# Altium PCB PCB1.PcbDoc (part 2 of 2)
Units mil, origin at the board's own origin, x right, y up, seen from the top; angles counter-clockwise.
Board outline 13600 x 4300 mil, 2 copper layers (Top Layer, Bottom Layer); 273 components, 193 nets, 742 pads, 0 vias.
Unrouted connection lines stored in the file: 1.
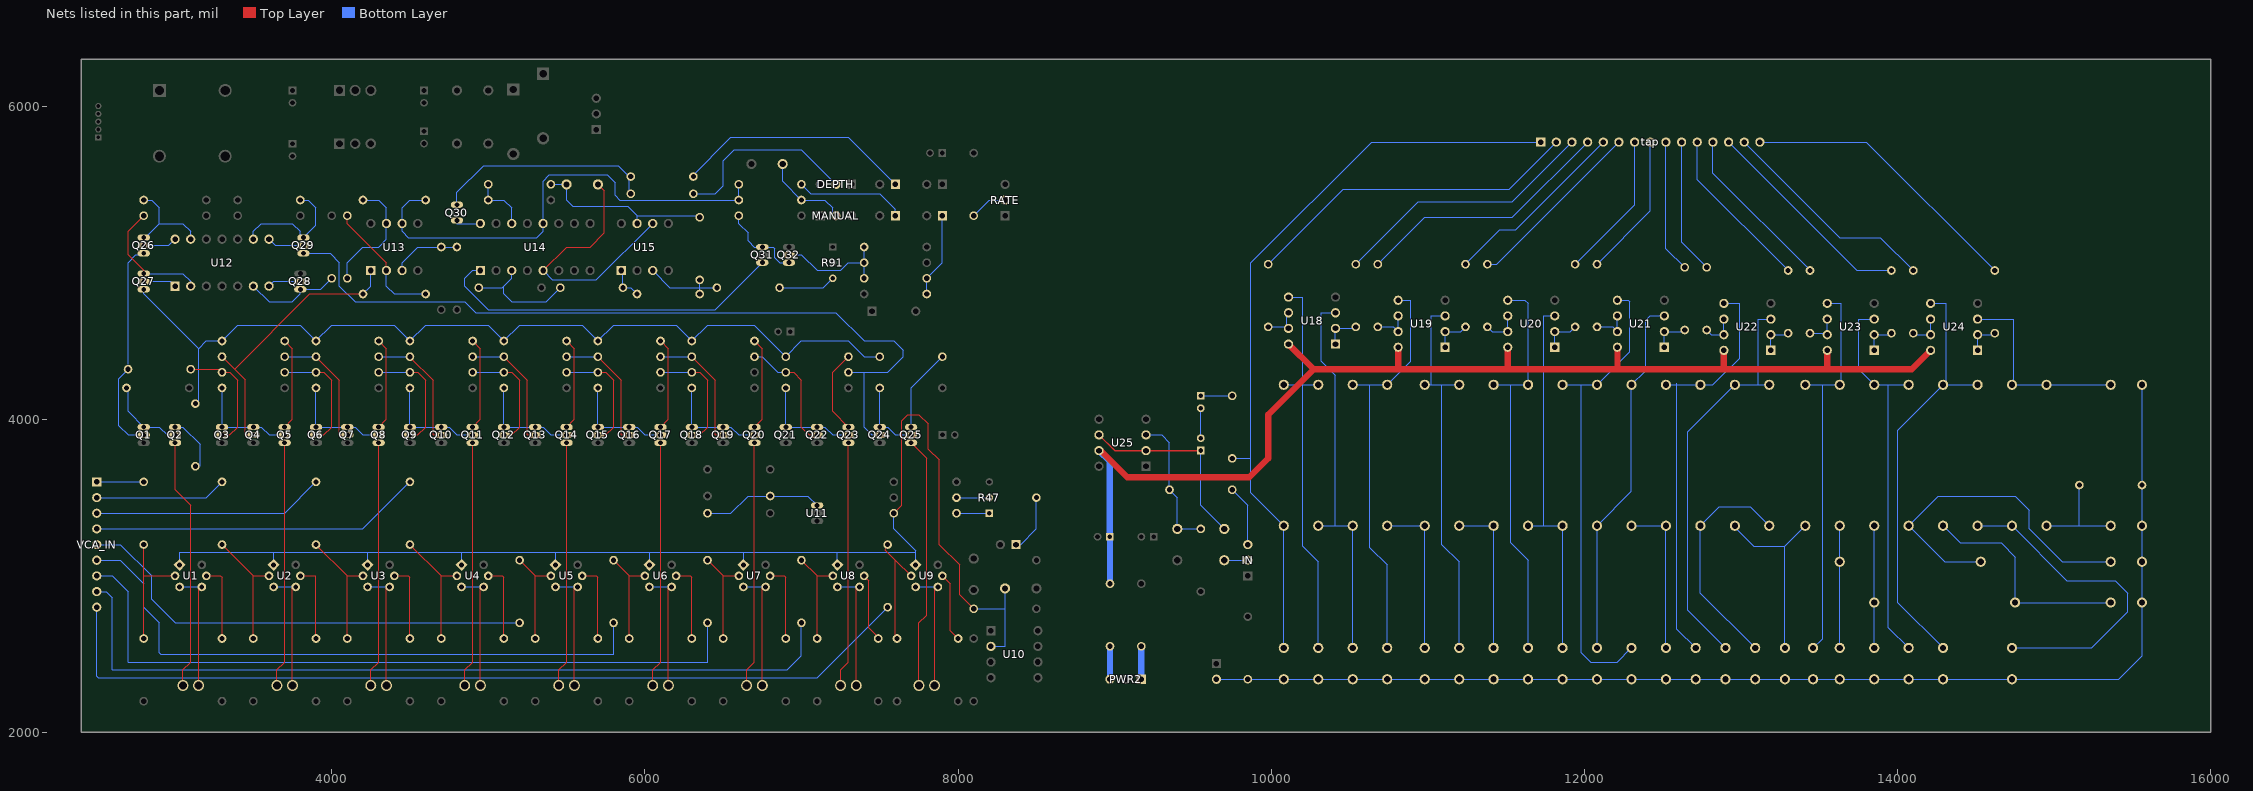
[diagram p2: the nets of this part, all layers, seen from the top]

## Nets (pads, with @x,y where several pads share a name; then routed paths per layer and width w, separated by ;. In a path a pad name is that pad's centre, name@x,y a point inside that pad or via, vN(x,y) a via of type N, cw(c..) or ccw(c..) an arc to the next point about the centre after c; other vN are vias at no path point) (continued)
NetC8_2: C8.2 R46.1 R49.2 U1.1 U2.1 U3.1 U4.1 U5.1 U6.1 U7.1 U8.1 U9.1 U10.2 | length 8498.2
  Top Layer w7.87: R46.1@7590,3400 7640,3450 7640,3990 7680,4030 7750,4030 7810,3970 7810,3810 7880,3740 7880,3200 8010,3070 8010,2880 R49.2@8100,2790
  Bottom Layer w7.87: U1.1@3029.29,3070.71 3029.29,3149.29 3030,3150 3630,3150 ; U2.1@3630,3071.42 3630,3150 ; U3.1@4230,3071.42 4230,3150 ; U4.1@4830,3071.42 4830,3150 ; U5.1@5430,3071.42 5430,3150 ; U6.1@6030,3071.42 6030,3150 ; U7.1@6630,3071.42 6630,3150 ; U8.1@7230,3071.42 7230,3150 ; R46.1@7590,3400 7590,3300 7729.29,3160.71 7729.29,3150 ; U9.1@7729.29,3070.71 7729.29,3150 ; R49.2@8100,2790 8300,2790 ; U10.2@8210,2550 8300,2550 C8.2@8300,2920 ; 3630,3150 4230,3150 ; 4230,3150 4830,3150 ; 4830,3150 5430,3150 ; 5430,3150 6030,3150 ; 6030,3150 6630,3150 ; 6630,3150 7230,3150 ; 7230,3150 7729.29,3150
NetC10_1: C10.1 R83.2 R89.2 U15.7 | length 1141.4
  Bottom Layer w7.87: R83.2@5400,5500 C10.1@5500,5500 5500,5400 5540,5360 5890,5360 5950,5300 ; U15.7@5950,5250 5950,5300 ; R89.2@6350,5300 5950,5300
NetC10_2: C10.2 U14.5 U15.6 | length 1689.9
  Top Layer w7.87: U14.5@5350,4950 5500,5100 5650,5100 5740,5190 5740,5460 C10.2@5700,5500
  Bottom Layer w7.87: U14.5@5350,4950 5410,4890 5690,4890 U15.6@6050,5250
NetC11_1: C11.1 MANUAL.2 R80.1 | length 550.4
  Bottom Layer w7.87: C11.1@6880,5630 6880,5520 R80.1@7000,5400 7150,5400 7200,5350 MANUAL.2@7200,5300
NetC14_1: C14.1 C17.1 U25.2 U25.6 | length 1254.4
  Top Layer w7.87: C14.1@9549.37,3800 C14.1@9550,3800.63
  Top Layer w10: U25.6@8900,3900 9000,3800 U25.2@9200,3800 C14.1@9549.37,3800
  Bottom Layer w7.87: C14.1@9550,3800.63 9550,3450 C17.1@9700,3300
NetC14_2: C14.2 C15.2 | length 191.3
  Bottom Layer w7.87: C14.2@9550,3879.37 C15.2@9550,4070.63
NetC15_1: C15.1 R113.1 | length 199.4
  Bottom Layer w7.87: C15.1@9550,4149.37 R113.1@9749.37,4149.37
NetC16_2: C16.2 R112.1 R114.2 U25.3 | length 891.4
  Bottom Layer w7.87: U25.3@9200,3900 9300,3900 9350,3850 R112.1@9350,3550 9400,3500 C16.2@9400,3300 R114.2@9550,3300
NetC17_2: C17.2 IN.2 | length 150
  Bottom Layer w7.87: C17.2@9700,3100 IN.2@9850,3100
NetC18_1: C18.1 C19.1 C20.1 C21.1 C22.1 C23.1 C24.1 C25.1 C26.1 C27.1 C28.1 C29.1 C30.1 C31.1 C32.1 C33.1 C34.1 C35.1 C36.1 C37.1 C38.1 C39.1 C40.1 C41.1 C42.1 C43.1 CH.2 R115.2 R116.1 | length 7692.1
  Bottom Layer w7.87: CH.2@9660,2340 9860,2340 C18.1@10080,2340 C19.1@10300,2340 C20.1@10520,2340 C21.1@10740,2340 C22.1@10980,2340 C23.1@11200,2340 C24.1@11420,2340 C25.1@11640,2340 C26.1@11860,2340 C28.1@12080,2340 C27.1@12300,2340 C29.1@12520,2340 C30.1@12710,2340 C32.1@12900,2340 C31.1@13090,2340 C33.1@13280,2340 C34.1@13460,2340 C35.1@13630,2340 C38.1@13850,2340 C37.1@14070,2340 C40.1@14290,2340 C41.1@14730,2340 15410,2340 15560,2490 C39.1@15560,2830 C36.1@15560,3090 C43.1@15560,3320 R116.1@15560,3580 C42.1@15560,4220
NetC18_2: C18.2 L1.1 R113.2 tap.1 | length 4835.9
  Bottom Layer w7.87: R113.2@9750,3750 9870,3750 ; C18.2@10080,2540 L1.1@10080,3320 9870,3530 9870,3750 ; tap.1@11720,5770 10640,5770 9870,5000 9870,3750
NetC19_2: C19.2 L1.2 L2.1 U18.5 | length 2591.4
  Bottom Layer w7.87: L1.2@10080,4220 10200,4220 ; U18.5@10110,4780 10200,4780 10200,4220 ; C19.2@10300,2540 10300,3090 10200,3190 10200,4220 ; L2.1@10300,4220 10200,4220
NetC20_2: C20.2 L2.2 L3.1 U18.3 | length 2487.3
  Bottom Layer w7.87: L2.2@10300,3320 10410,3320 ; U18.3@10410,4680 10320,4680 10320,4370 10410,4280 10410,3320 ; C20.2@10520,2540 L3.1@10520,3320 10410,3320
NetC21_2: C21.2 L3.2 L4.1 U19.5 | length 2627.7
  Bottom Layer w7.87: L3.2@10520,4220 10630,4220 ; C21.2@10740,2540 10740,3070 10630,3180 10630,4220 ; U19.5@10810,4760 10890,4760 10890,4370 L4.1@10740,4220 10630,4220
NetC22_2: C22.2 L4.2 L5.1 | length 1020
  Bottom Layer w7.87: L4.2@10740,3320 L5.1@10980,3320 C22.2@10980,2540
NetC23_2: C23.2 L5.2 L6.1 U19.3 | length 2475.6
  Bottom Layer w7.87: L5.2@10980,4220 11020,4220 ; U19.3@11110,4660 11020,4660 11020,4220 ; C23.2@11200,2540 11200,3090 11090,3200 11090,4220 ; L6.1@11200,4220 11090,4220 ; 11020,4220 11090,4220
NetC24_2: C24.2 L6.2 L7.1 | length 1000
  Bottom Layer w7.87: L6.2@11200,3320 L7.1@11420,3320 C24.2@11420,2540
NetC25_2: C25.2 L7.2 L8.1 U20.5 | length 2603.8
  Bottom Layer w7.87: L7.2@11420,4220 11530,4220 ; U20.5@11510,4760 11620,4760 11640,4740 L8.1@11640,4220 11530,4220 ; C25.2@11640,2540 11640,3100 11530,3210 11530,4220
NetC26_2: C26.2 L8.2 L9.1 U20.3 | length 2410
  Bottom Layer w7.87: L8.2@11640,3320 11740,3320 ; U20.3@11810,4660 11740,4660 11740,3320 ; C26.2@11860,2540 L9.1@11860,3320 11740,3320
NetC27_2: C27.2 L9.2 L10.1 U21.5 | length 3013.3
  Bottom Layer w7.87: L9.2@11860,4220 11980,4220 ; U21.5@12210,4760 12280,4760 12290,4750 12290,4430 L10.1@12080,4220 11980,4220 ; C27.2@12300,2540 12210,2450 12040,2450 11980,2510 11980,4220
NetC28_2: C28.2 L10.2 L11.1 U21.3 | length 2350.8
  Bottom Layer w7.87: C28.2@12080,2540 L10.2@12080,3320 12300,3540 L11.1@12300,4220 12390,4310 12390,4630 12420,4660 U21.3@12510,4660
NetC29_2: C29.2 L11.2 L12.1 | length 1000
  Bottom Layer w7.87: L11.2@12300,3320 L12.1@12520,3320 C29.2@12520,2540
NetC30_2: C30.2 L12.2 L13.1 U22.5 | length 2730.1
  Bottom Layer w7.87: L12.2@12520,4220 12590,4220 ; 12590,4230 12590,4220 ; C30.2@12710,2540 12590,2660 12590,4220 ; U22.5@12890,4740 12990,4740 12990,4390 12820,4220 L13.1@12740,4220 12590,4220
NetC31_2: C31.2 L13.2 L14.1 | length 1464.4
  Bottom Layer w7.87: C31.2@13090,2540 12740,2890 L13.2@12740,3320 12860,3440 13060,3440 L14.1@13180,3320
NetC32_2: C32.2 L14.2 L15.1 U22.3 | length 2623.7
  Bottom Layer w7.87: C32.2@12900,2540 12660,2780 12660,3920 L15.1@12960,4220 13110,4220 ; L14.2@13180,4220 13110,4220 ; U22.3@13190,4640 13110,4640 13110,4220
NetC33_2: C33.2 L15.2 L16.1 | length 1213.6
  Bottom Layer w7.87: L15.2@12960,3320 12960,3310 13080,3190 13280,3190 ; C33.2@13280,2540 13280,3190 ; L16.1@13410,3320 13280,3190
NetC34_2: C34.2 L16.2 L17.1 U23.5 | length 2539
  Bottom Layer w7.87: L16.2@13410,4220 13520,4220 ; C34.2@13460,2540 13520,2600 13520,4220 ; U23.5@13550,4740 13640,4740 13640,4230 L17.1@13630,4220 13520,4220
NetC35_2: C35.2 L17.2 L18.1 | length 780
  Bottom Layer w7.87: C35.2@13630,2540 L18.1@13630,3090 L17.2@13630,3320
NetC36_2: C36.2 L18.2 L19.1 | length 2168.2
  Bottom Layer w7.87: L18.2@14530,3090 14300,3090 L19.1@14070,3320 14260,3510 14750,3510 14840,3420 14840,3300 15050,3090 C36.2@15360,3090
NetC37_2: C37.2 L19.2 L20.1 U23.3 | length 2515.3
  Bottom Layer w7.87: U23.3@13850,4640 13750,4640 13750,4320 L20.1@13850,4220 L19.2@14070,4220 ; 13940,4220 13940,2670 C37.2@14070,2540
NetC38_2: C38.2 L20.2 L21.1 | length 780
  Bottom Layer w7.87: C38.2@13850,2540 L21.1@13850,2830 L20.2@13850,3320
NetC39_2: C39.2 L21.2 L22.1 | length 1442.8
  Bottom Layer w7.87: L22.1@14290,3320 14400,3210 14660,3210 14750,3120 L21.2@14750,2830 C39.2@15360,2830
NetC40_2: C40.2 L22.2 L23.1 U24.5 | length 2768.5
  Bottom Layer w7.87: U24.5@14210,4740 14310,4740 14310,4240 L22.2@14290,4220 ; C40.2@14290,2540 14000,2830 14000,3930 L22.2@14290,4220 ; L23.1@14510,4220 L22.2@14290,4220
NetC41_2: C41.2 L23.2 L24.1 | length 2093.4
  Bottom Layer w7.87: L23.2@14510,3320 L24.1@14730,3320 15080,2970 15390,2970 15470,2890 15470,2770 15240,2540 C41.2@14730,2540
NetC42_2: C42.2 L24.2 L25.1 U24.3 | length 1284.1
  Bottom Layer w7.87: U24.3@14510,4640 14740,4640 14740,4230 L24.2@14730,4220 L25.1@14950,4220 C42.2@15360,4220
NetC43_2: C43.2 L25.2 R116.2 | length 670
  Bottom Layer w7.87: L25.2@14950,3320 15160,3320 ; R116.2@15160,3580 15160,3320 ; C43.2@15360,3320 15160,3320
NetD1_1: D1.1 U1.3 U1.4 | length 770.7
  Top Layer w7.87: D1.1@3150,2300 U1.4@3150,2929.29
  Bottom Layer w7.87: U1.3@3029.29,2929.29 3150,2929.29 U1.4@3170.71,2929.29
NetD1_2: D1.2 Q2.1 | length 1612.1
  Top Layer w7.87: Q2.1@3000,3850 3000,3550 3100,3450 3100,2450 3050,2400 D1.2@3050,2300
NetD2_1: D2.1 U2.3 U2.4 | length 770.7
  Top Layer w7.87: D2.1@3750,2300 U2.4@3750,2929.29
  Bottom Layer w7.87: U2.3@3629.29,2929.29 3750,2929.29 U2.4@3770.71,2929.29
NetD2_2: D2.2 Q5.1 | length 1570.7
  Top Layer w7.87: D2.2@3650,2300 3650,2400 3700,2450 Q5.1@3700,3850
NetD3_1: D3.1 U3.3 U3.4 | length 770.7
  Top Layer w7.87: D3.1@4350,2300 U3.4@4350,2929.29
  Bottom Layer w7.87: U3.3@4229.29,2929.29 4350,2929.29 U3.4@4370.71,2929.29
NetD3_2: D3.2 Q8.1 | length 1570.7
  Top Layer w7.87: D3.2@4250,2300 4250,2400 4300,2450 Q8.1@4300,3850
NetD4_1: D4.1 U4.3 U4.4 | length 770.7
  Top Layer w7.87: D4.1@4950,2300 U4.4@4950,2929.29
  Bottom Layer w7.87: U4.3@4829.29,2929.29 4950,2929.29 U4.4@4970.71,2929.29
NetD4_2: D4.2 Q11.1 | length 1570.7
  Top Layer w7.87: D4.2@4850,2300 4850,2400 4900,2450 Q11.1@4900,3850
NetD5_1: D5.1 U5.3 U5.4 | length 770.7
  Top Layer w7.87: D5.1@5550,2300 U5.4@5550,2929.29
  Bottom Layer w7.87: U5.3@5429.29,2929.29 5550,2929.29 U5.4@5570.71,2929.29
NetD5_2: D5.2 Q14.1 | length 1570.7
  Top Layer w7.87: D5.2@5450,2300 5450,2400 5500,2450 Q14.1@5500,3850
NetD6_1: D6.1 U6.3 U6.4 | length 770.7
  Top Layer w7.87: D6.1@6150,2300 U6.4@6150,2929.29
  Bottom Layer w7.87: U6.3@6029.29,2929.29 6150,2929.29 U6.4@6170.71,2929.29
NetD6_2: D6.2 Q17.1 | length 1570.7
  Top Layer w7.87: D6.2@6050,2300 6050,2400 6100,2450 Q17.1@6100,3850
NetD7_1: D7.1 U7.3 U7.4 | length 770.7
  Top Layer w7.87: D7.1@6750,2300 U7.4@6750,2929.29
  Bottom Layer w7.87: U7.3@6629.29,2929.29 6750,2929.29 U7.4@6770.71,2929.29
NetD7_2: D7.2 Q20.1 | length 1570.7
  Top Layer w7.87: D7.2@6650,2300 6650,2400 6700,2450 Q20.1@6700,3850
NetD8_1: D8.1 U8.3 U8.4 | length 770.7
  Top Layer w7.87: D8.1@7350,2300 U8.4@7350,2929.29
  Bottom Layer w7.87: U8.3@7229.29,2929.29 7350,2929.29 U8.4@7370.71,2929.29
NetD8_2: D8.2 Q23.1 | length 1570.7
  Top Layer w7.87: D8.2@7250,2300 7250,2400 7300,2450 Q23.1@7300,3850
NetD9_1: D9.1 U9.3 U9.4 | length 750
  Top Layer w7.87: D9.1@7850,2300 U9.4@7850,2929.29
  Bottom Layer w7.87: U9.3@7729.29,2929.29 U9.4@7850,2929.29
NetD9_2: D9.2 Q25.1 | length 1612.1
  Top Layer w7.87: Q25.1@7700,3850 7800,3750 7800,2750 7750,2700 D9.2@7750,2300
NetDEPTH_2: DEPTH.2 R84.1 | length 1220.8
  Bottom Layer w7.87: R84.1@6300,5440 6450,5440 6500,5490 6500,5650 6570,5720 7000,5720 DEPTH.2@7220,5500
NetDEPTH_CV_1: DEPTH_CV.1 R85.1 | length 1527.8
  Bottom Layer w7.87: R85.1@6300,5550 6550,5800 7300,5800 DEPTH_CV.1@7600,5500
NetIN_3: IN.3 R112.2 | length 391.4
  Bottom Layer w7.87: R112.2@9750,3550 9850,3450 IN.3@9850,3200
NetOUT_1: OUT.1 R51.1 | length 341.4
  Bottom Layer w7.87: 8400,3200 8500,3300 R51.1@8500,3500
NetPWR2_1: PWR2.1 R117.2 | length 210
  Bottom Layer w40: PWR2.1@9170,2340 R117.2@9170,2550
NetPWR2_3: PWR2.3 R118.2 | length 210
  Bottom Layer w40: PWR2.3@8970,2340 R118.2@8970,2550
NetQ1_2: Q1.2 Q26.1 R17.1 | length 1340.4
  Bottom Layer w7.87: R17.1@2700,4320 2640,4260 2640,3960 2700,3900 Q1.2@2800,3900 ; 2700,4350 2700,5000 2750,5050 Q26.1@2800,5050
NetQ1_3: Q1.3 Q2.2 R27.1 | length 512.1
  Bottom Layer w7.87: R27.1@2700,4200 2700,4050 Q1.3@2800,3950 2900,3950 2950,3900 Q2.2@3000,3900
NetQ2_3: Q2.3 R1.2 | length 345.6
  Bottom Layer w7.87: Q2.3@3000,3950 3050,3950 3160,3840 3160,3700
NetQ3_2: Q3.2 R17.2 R18.1 | length 749.7
  Top Layer w7.87: R17.2@3100,4320 3280,4320 R18.1@3300,4300 3350,4300 3400,4250 3400,3950 3350,3900 Q3.2@3300,3900
NetQ3_3: Q3.3 Q4.3 Q5.2 R28.1 | length 670.7
  Bottom Layer w7.87: R28.1@3300,4200 Q3.3@3300,3950 Q4.3@3500,3950 3550,3950 3600,3900 Q5.2@3700,3900
NetQ4_2: Q4.2 R10.1 R70.2 U13.1 | length 1801.7
  Top Layer w7.87: R10.1@3300,4400 3380,4320 ; 3450,3900 3448.82,3901.18 ; Q4.2@3498.82,3901.18 3448.82,3901.18 ; R70.2@4200,4800 3860,4800 3380,4320 ; 3380,4320 3448.82,4251.18 3448.82,3901.18
  Bottom Layer w7.87: R70.2@4200,4800 4250,4850 U13.1@4250,4950
NetQ5_3: Q5.3 R2.2 | length 591.4
  Top Layer w7.87: Q5.3@3700,3950 3750,4000 3750,4450 R2.2@3700,4500
NetQ6_2: Q6.2 R18.2 R19.1 | length 741.4
  Top Layer w7.87: Q6.2@3900,3900 3950,3900 4000,3950 4000,4250 3950,4300 R19.1@3900,4300
  Bottom Layer w7.87: R18.2@3700,4300 R19.1@3900,4300
NetQ6_3: Q6.3 Q7.3 Q8.2 R29.1 | length 670.7
  Bottom Layer w7.87: R29.1@3900,4200 Q6.3@3900,3950 Q7.3@4100,3950 4150,3950 4200,3900 Q8.2@4300,3900
NetQ7_2: Q7.2 R10.2 R11.1 | length 814.8
  Top Layer w7.87: R11.1@3900,4400 4050,4250 4048.82,4248.82 4048.82,3901.18 ; 4050,3900 4048.82,3901.18 ; Q7.2@4100,3900 4098.82,3901.18 4048.82,3901.18
  Bottom Layer w7.87: R10.2@3700,4400 R11.1@3900,4400
NetQ8_3: Q8.3 R3.2 | length 591.4
  Top Layer w7.87: Q8.3@4300,3950 4350,4000 4350,4450 R3.2@4300,4500
NetQ9_2: Q9.2 R19.2 R20.1 | length 741.4
  Top Layer w7.87: Q9.2@4500,3900 4550,3900 4600,3950 4600,4250 4550,4300 R20.1@4500,4300
  Bottom Layer w7.87: R19.2@4300,4300 R20.1@4500,4300
NetQ9_3: Q9.3 Q10.3 Q11.2 R30.1 | length 670.7
  Bottom Layer w7.87: R30.1@4500,4200 Q9.3@4500,3950 Q10.3@4700,3950 4750,3950 4800,3900 Q11.2@4900,3900
NetQ10_2: Q10.2 R11.2 R12.1 | length 809.8
  Top Layer w7.87: R12.1@4500,4397.64 4648.82,4248.82 4648.82,3901.18 4650,3900 Q10.2@4700,3900
  Bottom Layer w7.87: R11.2@4300,4400 R12.1@4500,4400
NetQ11_3: Q11.3 R4.2 | length 591.4
  Top Layer w7.87: Q11.3@4900,3950 4950,4000 4950,4450 R4.2@4900,4500
NetQ12_2: Q12.2 R20.2 R21.1 | length 741.4
  Top Layer w7.87: Q12.2@5100,3900 5150,3900 5200,3950 5200,4250 5150,4300 R21.1@5100,4300
  Bottom Layer w7.87: R20.2@4900,4300 R21.1@5100,4300
NetQ12_3: Q12.3 Q13.3 Q14.2 R31.1 | length 670.7
  Bottom Layer w7.87: R31.1@5100,4200 Q12.3@5100,3950 Q13.3@5300,3950 5350,3950 5400,3900 Q14.2@5500,3900
NetQ13_2: Q13.2 R12.2 R13.1 | length 813.1
  Top Layer w7.87: R13.1@5100,4400 5250,4250 5248.82,4248.82 5248.82,3901.18 ; 5250,3900 5248.82,3901.18 ; Q13.2@5298.82,3901.18 5248.82,3901.18
  Bottom Layer w7.87: R12.2@4900,4400 R13.1@5100,4400
NetQ14_3: Q14.3 R5.2 | length 591.4
  Top Layer w7.87: Q14.3@5500,3950 5550,4000 5550,4450 R5.2@5500,4500
NetQ15_2: Q15.2 R21.2 R22.1 | length 741.4
  Top Layer w7.87: Q15.2@5700,3900 5750,3900 5800,3950 5800,4250 5750,4300 R22.1@5700,4300
  Bottom Layer w7.87: R21.2@5500,4300 R22.1@5700,4300
NetQ15_3: Q15.3 Q16.3 Q17.2 R32.1 | length 670.7
  Bottom Layer w7.87: R32.1@5700,4200 Q15.3@5700,3950 Q16.3@5900,3950 5950,3950 6000,3900 Q17.2@6100,3900
NetQ16_2: Q16.2 R13.2 R14.1 | length 813.1
  Top Layer w7.87: R14.1@5700,4400 5850,4250 5848.82,4248.82 5848.82,3901.18 5898.82,3901.18 Q16.2@5900,3900
  Bottom Layer w7.87: R13.2@5500,4400 R14.1@5700,4400
NetQ17_3: Q17.3 R6.2 | length 591.4
  Top Layer w7.87: Q17.3@6100,3950 6150,4000 6150,4450 R6.2@6100,4500
NetQ18_2: Q18.2 R22.2 R23.1 | length 741.4
  Top Layer w7.87: Q18.2@6300,3900 6350,3900 6400,3950 6400,4250 6350,4300 R23.1@6300,4300
  Bottom Layer w7.87: R22.2@6100,4300 R23.1@6300,4300
NetQ18_3: Q18.3 Q19.3 Q20.2 R33.1 | length 670.7
  Bottom Layer w7.87: R33.1@6300,4200 Q18.3@6300,3950 Q19.3@6500,3950 6550,3950 6600,3900 Q20.2@6700,3900
NetQ19_2: Q19.2 R14.2 R15.1 | length 813.1
  Top Layer w7.87: R15.1@6300,4400 6450,4250 6448.82,4248.82 6448.82,3901.18 ; 6450,3900 6448.82,3901.18 ; Q19.2@6498.82,3901.18 6448.82,3901.18
  Bottom Layer w7.87: R14.2@6100,4400 R15.1@6300,4400
NetQ20_3: Q20.3 R7.2 | length 591.4
  Top Layer w7.87: Q20.3@6700,3950 6750,4000 6750,4450 R7.2@6700,4500
NetQ21_3: Q21.3 Q22.3 Q23.2 R34.1 | length 670.7
  Bottom Layer w7.87: R34.1@6900,4200 Q21.3@6900,3950 Q22.3@7100,3950 7150,3950 7200,3900 Q23.2@7300,3900
NetQ22_2: Q22.2 R15.2 R16.1 | length 782.8
  Top Layer w7.87: R16.1@6900,4300 6950,4300 7000,4250 7000,3950 7050,3900 Q22.2@7100,3900
  Bottom Layer w7.87: R15.2@6700,4400 6750,4400 6850,4300 R16.1@6900,4300
NetQ23_3: Q23.3 R8.2 | length 532.8
  Top Layer w7.87: Q23.3@7300,3950 7200,4050 7200,4300 R8.2@7300,4400
NetQ24_2: Q24.2 Q29.1 R16.2 | length 5076.8
  Bottom Layer w7.87: Q29.1@3820,5060 3990,5060 4050,5000 4050,4850 4150,4750 4850,4750 4920,4680 7220,4680 7400,4500 7590,4500 7650,4440 7650,4400 7550,4300 R16.2@7300,4300 ; 7400,4300 7400,3950 7450,3900 Q24.2@7500,3900
NetQ24_3: Q24.3 Q25.2 R35.1 | length 470.7
  Bottom Layer w7.87: R35.1@7500,4200 Q24.3@7500,3950 7550,3950 7600,3900 Q25.2@7700,3900
NetQ25_3: Q25.3 R9.2 | length 532.8
  Bottom Layer w7.87: Q25.3@7700,3950 7700,4200 R9.2@7900,4400
NetQ26_2: Q26.2 U12.14 | length 216.6
  Bottom Layer w7.87: Q26.2@2800,5110 2960,5110 U12.14@3000,5150
NetQ26_3: Q26.3 R78.2 U12.13 | length 632.8
  Bottom Layer w7.87: Q26.3@2800,5150 2900,5250 ; R78.2@2800,5400 2850,5400 2900,5350 2900,5250 ; U12.13@3100,5150 3100,5200 3050,5250 2900,5250
NetQ27_1: Q27.1 R1.1 R2.1 R3.1 R4.1 R5.1 R6.1 R7.1 R8.1 R9.1 | length 5857
  Bottom Layer w7.87: Q27.1@2800,4830 2800,4800 3150,4450 ; R1.1@3150,4110 3150,4450 ; R9.1@7500,4400 7400,4400 7300,4500 7000,4500 R8.1@6900,4400 6700,4600 6400,4600 R7.1@6300,4500 6200,4600 5800,4600 R6.1@5700,4500 5600,4600 5200,4600 R5.1@5100,4500 5000,4600 4600,4600 R4.1@4500,4500 4400,4600 4000,4600 R3.1@3900,4500 3800,4600 3400,4600 R2.1@3300,4500 3200,4500 3150,4450
NetQ27_2: Q27.2 U12.1 | length 212.4
  Bottom Layer w7.87: Q27.2@2800,4880 2970,4880 U12.1@3000,4850
NetQ27_3: Q27.3 R79.2 U12.2 | length 783.6
  Top Layer w7.87: 2800,4950 2700,5050 2700,5200 R79.2@2800,5300
  Bottom Layer w7.87: Q27.3@2800,4930 3050,4930 3100,4880 U12.2@3100,4850
NetQ28_2: Q28.2 U12.7 | length 212.4
  Bottom Layer w7.87: U12.7@3600,4850 3630,4880 Q28.2@3800,4880
NetQ28_3: Q28.3 R75.1 U12.6 | length 621.1
  Bottom Layer w7.87: U12.6@3500,4850 3600,4750 3750,4750 3800,4800 Q28.3@3800,4830 3930,4830 R75.1@4000,4900
NetQ29_2: Q29.2 U12.8 | length 236.6
  Bottom Layer w7.87: U12.8@3600,5150 3640,5110 Q29.2@3820,5110
NetQ29_3: Q29.3 R77.2 U12.9 | length 783.6
  Bottom Layer w7.87: U12.9@3500,5150 3500,5200 3550,5250 3750,5250 3800,5200 3800,5180 Q29.3@3820,5160 3900,5240 3900,5350 3850,5400 R77.2@3800,5400
NetQ30_1: Q30.1 U14.16 | length 150
  Bottom Layer w7.87: 4800,5250 U14.16@4950,5250
NetQ30_3: Q30.3 R84.2 R85.2 | length 1389.4
  Bottom Layer w7.87: Q30.3@4800,5370 4800,5450 4970,5620 5830,5620 5900,5550 R84.2@5900,5440
NetQ31_1: Q31.1 U14.1 | length 2257.1
  Bottom Layer w7.87: U14.1@4950,4950 4900,4950 4850,4900 4850,4850 5000,4700 6450,4700 Q31.1@6750,5000
NetQ31_3: Q31.3 Q32.3 R93.2 | length 538
  Bottom Layer w7.87: R93.2@6600,5300 6600,5250 6660,5190 6660,5140 6700,5100 Q31.3@6750,5100 6820,5100 6830,5090 6830,5030 6860,5000 Q32.3@6920,5000
NetQ32_2: Q32.2 R92.2 R94.2 R96.2 | length 742.1
  Bottom Layer w7.87: Q32.2@6920,5050 7000,5050 7100,4950 7250,4950 7300,5000 R96.2@7400,5000 ; R94.2@7400,4900 R96.2@7400,5000 ; R92.2@7400,5100 R96.2@7400,5000
NetR25_2: R25.2 R26.1 U11.1 | length 770.4
  Bottom Layer w7.87: R25.2@6400,3400 6550,3400 6660,3510 7040,3510 U11.1@7100,3450
NetR36_1: R36.1 R52.2 U1.2 | length 800
  Top Layer w7.87: R52.2@2800,2600 2800,3000 ; R36.1@2800,3200 2800,3000 ; U1.2@3000,3000 2800,3000
NetR36_2: R36.2 VCA_IN.1 | length 300
  Bottom Layer w7.87: VCA_IN.1@2500,3600 R36.2@2800,3600
NetR37_1: R37.1 R54.2 U2.2 | length 782.8
  Top Layer w7.87: R37.1@3300,3200 3500,3000 ; R54.2@3500,2600 3500,3000 ; U2.2@3600,3000 3500,3000
NetR37_2: R37.2 VCA_IN.2 | length 841.4
  Bottom Layer w7.87: VCA_IN.2@2500,3500 3200,3500 R37.2@3300,3600
NetR38_1: R38.1 R56.2 U3.2 | length 782.8
  Top Layer w7.87: R38.1@3900,3200 4100,3000 ; R56.2@4100,2600 4100,3000 ; U3.2@4200,3000 4100,3000
NetR38_2: R38.2 VCA_IN.3 | length 1482.8
  Bottom Layer w7.87: VCA_IN.3@2500,3400 3700,3400 R38.2@3900,3600
NetR39_1: R39.1 R58.2 U4.2 | length 782.8
  Top Layer w7.87: R39.1@4500,3200 4700,3000 ; R58.2@4700,2600 4700,3000 ; U4.2@4800,3000 4700,3000
NetR39_2: R39.2 VCA_IN.4 | length 2124.3
  Bottom Layer w7.87: VCA_IN.4@2500,3300 4200,3300 R39.2@4500,3600
NetR40_1: R40.1 R60.2 U5.2 | length 641.4
  Top Layer w7.87: R40.1@5200,3100 5300,3000 ; R60.2@5300,2600 5300,3000 ; U5.2@5400,3000 5300,3000
NetR40_2: R40.2 VCA_IN.5 | length 2995
  Bottom Layer w7.87: VCA_IN.5@2500,3200 2650,3200 2850,3000 2850,2850 3000,2700 R40.2@5200,2700
NetR41_1: R41.1 R62.2 U6.2 | length 641.4
  Top Layer w7.87: R41.1@5800,3100 5900,3000 ; R62.2@5900,2600 5900,3000 ; U6.2@6000,3000 5900,3000
NetR41_2: R41.2 VCA_IN.6 | length 3947.7
  Bottom Layer w7.87: VCA_IN.6@2500,3100 2650,3100 2800,2950 2800,2800 2900,2700 2900,2510 2910,2500 5800,2500 R41.2@5800,2700
NetR42_1: R42.1 R64.2 U7.2 | length 641.4
  Top Layer w7.87: R42.1@6400,3100 6500,3000 ; R64.2@6500,2600 6500,3000 ; U7.2@6600,3000 6500,3000
NetR42_2: R42.2 VCA_IN.7 | length 4641.4
  Bottom Layer w7.87: VCA_IN.7@2500,3000 2600,3000 2700,2900 2700,2450 6400,2450 R42.2@6400,2700
NetR43_1: R43.1 R66.2 U8.2 | length 641.4
  Top Layer w7.87: R43.1@7000,3100 7100,3000 ; R66.2@7100,2600 7100,3000 ; U8.2@7200,3000 7100,3000
NetR43_2: R43.2 VCA_IN.8 | length 5223.8
  Bottom Layer w7.87: VCA_IN.8@2500,2900 2560,2900 2600,2860 2600,2400 6910,2400 7000,2490 R43.2@7000,2700
NetR44_1: R44.1 R68.2 U9.2 | length 771.1
  Top Layer w7.87: R44.1@7550,3200 7535.36,3164.64 7600,3100 ; R68.2@7600,2600 7600,3100 ; U9.2@7700,3000 7600,3100
NetR44_2: R44.2 VCA_IN.9 | length 5680.5
  Bottom Layer w7.87: VCA_IN.9@2500,2800 2500,2360 2510,2350 7100,2350 R44.2@7550,2800
NetR45_1: R45.1 R47.2 | length 210
  Bottom Layer w7.87: R45.1@7990,3500 R47.2@8200,3500
NetR46_2: R46.2 R47.1 | length 210
  Bottom Layer w7.87: R46.2@7990,3400 R47.1@8200,3400
NetR53_2: R53.2 U1.5 | length 494.1
  Top Layer w7.87: U1.5@3200,3000 3290,3000 3300,2990 R53.2@3300,2600
NetR55_2: R55.2 U2.5 | length 500
  Top Layer w7.87: U2.5@3800,3000 3900,3000 R55.2@3900,2600
NetR57_2: R57.2 U3.5 | length 494.1
  Top Layer w7.87: U3.5@4400,3000 4490,3000 4500,2990 R57.2@4500,2600
NetR59_2: R59.2 U4.5 | length 494.1
  Top Layer w7.87: U4.5@5000,3000 5090,3000 5100,2990 R59.2@5100,2600
NetR61_2: R61.2 U5.5 | length 494.1
  Top Layer w7.87: U5.5@5600,3000 5690,3000 5700,2990 R61.2@5700,2600
NetR63_2: R63.2 U6.5 | length 494.1
  Top Layer w7.87: U6.5@6200,3000 6290,3000 6300,2990 R63.2@6300,2600
NetR65_2: R65.2 U7.5 | length 494.1
  Top Layer w7.87: U7.5@6800,3000 6890,3000 6900,2990 R65.2@6900,2600
NetR67_2: R67.2 U8.5 | length 441.4
  Top Layer w7.87: U8.5@7400,3000 7430,2970 7430,2670 R67.2@7500,2600
NetR69_2: R69.2 U9.5 | length 441.4
  Top Layer w7.87: U9.5@7900,3000 7950,2950 7950,2650 R69.2@8000,2600
NetR70_1: R70.1 R71.2 U13.2 | length 824.3
  Top Layer w7.87: R71.2@4100,5300 4100,5250 4350,5000 U13.2@4350,4950
  Bottom Layer w7.87: U13.2@4350,4950 4350,4850 4400,4800 R70.1@4600,4800
NetR71_1: R71.1 R74.2 U13.7 | length 782.8
  Bottom Layer w7.87: R71.1@4100,4900 4100,5000 4200,5100 4300,5100 4350,5150 U13.7@4350,5250 4350,5350 4300,5400 R74.2@4200,5400
NetR72_1: R72.1 R73.2 U13.3 | length 441.4
  Bottom Layer w7.87: U13.3@4450,4950 4450,5000 4550,5100 R73.2@4700,5100 R72.1@4800,5100
NetR74_1: R74.1 R80.2 R81.2 U13.6 U14.12 | length 3053.6
  Bottom Layer w7.87: R74.1@4600,5400 4500,5400 4450,5350 U13.6@4450,5250 4450,5200 4490,5160 5310,5160 5350,5200 U14.12@5350,5250 5350,5520 5390,5560 5760,5560 5810,5510 5810,5430 5840,5400 R80.2@6600,5400 R81.2@6600,5500
NetR81_1: R81.1 SCAN_CV.1 | length 706.3
  Bottom Layer w7.87: R81.1@7000,5500 7060,5440 7500,5440 7600,5340 SCAN_CV.1@7600,5300
NetR82_2: R82.2 R83.1 U14.14 | length 370.7
  Bottom Layer w7.87: R83.1@5000,5500 R82.2@5000,5400 5100,5400 5150,5350 U14.14@5150,5250
NetR86_1: R86.1 R87.2 U14.3 | length 752.8
  Bottom Layer w7.87: R86.1@4940,4840 5090,4840 5100,4850 ; U14.3@5150,4950 5150,4900 5100,4850 ; R87.2@5460,4840 5370,4750 5150,4750 5100,4800 5100,4850
NetR87_1: R87.1 R88.2 U15.1 | length 220.7
  Bottom Layer w7.87: U15.1@5850,4950 5860,4940 R87.1@5860,4840 5910,4840 R88.2@5950,4800
NetR88_1: R88.1 R89.1 R90.1 U15.3 | length 555.6
  Bottom Layer w7.87: U15.3@6050,4950 6160,4840 6350,4840 ; R88.1@6350,4800 6350,4840 ; R89.1@6350,4900 6350,4840 ; R90.1@6460,4840 6350,4840
NetR90_2: R90.2 R91.3 | length 364.9
  Bottom Layer w7.87: R90.2@6860,4840 7140,4840 R91.3@7200,4900
NetR94_1: R94.1 R95.1 RATE_CV.1 | length 541.4
  Bottom Layer w7.87: R95.1@7800,4800 R94.1@7800,4900 7900,5000 RATE_CV.1@7900,5300
NetR97_1: R97.1 RATE.2 | length 241.4
  Bottom Layer w7.87: R97.1@8100,5300 8200,5400 RATE.2@8300,5400
NetR98_1: R98.1 U18.6 U18.7 | length 200
  Bottom Layer w7.87: R98.1@9980,4590 10100,4590 U18.6@10100,4670
NetR98_2: R98.2 tap.2 | length 2163.1
  Bottom Layer w7.87: R98.2@9980,4990 10460,5470 11520,5470 tap.2@11820,5770
NetR99_1: R99.1 U18.1 U18.2 | length 234.1
  Bottom Layer w7.87: U18.1@10410,4480 U18.2@10410,4580 ; U18.2@10420,4590 U18.2@10410,4580 ; R99.1@10530,4580 U18.2@10410,4580
NetR99_2: R99.2 tap.3 | length 1703.1
  Bottom Layer w7.87: R99.2@10540,4990 10940,5390 11540,5390 tap.3@11920,5770
NetR100_1: R100.1 U19.6 U19.7 | length 242.4
  Bottom Layer w7.87: R100.1@10680,4590 10780,4590 U19.7@10810,4560 U19.6@10810,4660
NetR100_2: R100.2 tap.4 | length 1663.1
  Bottom Layer w7.87: R100.2@10680,4990 10980,5290 11540,5290 tap.4@12020,5770
NetR101_1: R101.1 U19.1 U19.2 | length 242.4
  Bottom Layer w7.87: U19.1@11110,4460 U19.2@11110,4560 11210,4560 R101.1@11240,4590
NetR101_2: R101.2 tap.5 | length 1203.1
  Bottom Layer w7.87: R101.2@11240,4990 11460,5210 11560,5210 tap.5@12120,5770
NetR102_1: R102.1 U20.6 U20.7 | length 242.4
  Bottom Layer w7.87: R102.1@11380,4590 11410,4560 U20.7@11510,4560 U20.6@11510,4660
NetR102_2: R102.2 tap.6 | length 1163.1
  Bottom Layer w7.87: R102.2@11380,4990 11440,4990 tap.6@12220,5770
NetR103_1: R103.1 U20.1 U20.2 | length 242.4
  Bottom Layer w7.87: U20.1@11810,4460 U20.2@11810,4560 11910,4560 R103.1@11940,4590
NetR103_2: R103.2 tap.7 | length 937.4
  Bottom Layer w7.87: R103.2@11940,4990 12320,5370 tap.7@12320,5770
NetR104_1: R104.1 U21.6 U21.7 | length 242.4
  Bottom Layer w7.87: R104.1@12080,4590 12180,4590 U21.7@12210,4560 U21.6@12210,4660
NetR104_2: R104.2 tap.8 | length 920.8
  Bottom Layer w7.87: R104.2@12080,4990 12420,5330 tap.8@12420,5770
NetR105_1: R105.1 U21.1 U21.2 | length 234.1
  Bottom Layer w7.87: U21.1@12510,4460 U21.2@12510,4560 12630,4560 R105.1@12640,4570
NetR105_2: R105.2 tap.9 | length 849.7
  Bottom Layer w7.87: tap.9@12520,5770 12520,5090 R105.2@12640,4970
NetR106_1: R106.1 U22.6 U22.7 | length 222.4
  Bottom Layer w7.87: R106.1@12780,4570 12810,4540 U22.7@12890,4540 U22.6@12890,4640
NetR106_2: R106.2 tap.10 | length 866.3
  Bottom Layer w7.87: tap.10@12620,5770 12620,5130 R106.2@12780,4970
NetR107_1: R107.1 U22.1 U22.2 | length 214.1
  Bottom Layer w7.87: U22.1@13190,4440 U22.2@13190,4540 13290,4540 R107.1@13300,4550
NetR107_2: R107.2 tap.11 | length 1060.2
  Bottom Layer w7.87: tap.11@12720,5770 12720,5530 R107.2@13300,4950
NetR108_1: R108.1 U23.6 U23.7 | length 214.1
  Bottom Layer w7.87: R108.1@13440,4550 13540,4550 U23.7@13550,4540 U23.6@13550,4640
NetR108_2: R108.2 tap.12 | length 1076.8
  Bottom Layer w7.87: tap.12@12820,5770 12820,5570 R108.2@13440,4950
NetR109_1: R109.1 U23.1 U23.2 | length 214.1
  Bottom Layer w7.87: U23.1@13850,4440 U23.2@13850,4540 13950,4540 R109.1@13960,4550
NetR109_2: R109.2 tap.13 | length 1379.7
  Bottom Layer w7.87: tap.13@12920,5770 13740,4950 R109.2@13960,4950
NetR110_1: R110.1 U24.6 U24.7 | length 214.1
  Bottom Layer w7.87: R110.1@14100,4550 14110,4540 U24.7@14210,4540 U24.6@14210,4640
NetR110_2: R110.2 tap.14 | length 1419.7
  Bottom Layer w7.87: tap.14@13020,5770 13630,5160 13890,5160 R110.2@14100,4950
NetR111_1: R111.1 U24.1 U24.2 | length 214.1
  Bottom Layer w7.87: U24.1@14510,4440 U24.2@14510,4540 14610,4540 R111.1@14620,4550
NetR111_2: R111.2 tap.15 | length 1839.7
  Bottom Layer w7.87: tap.15@13120,5770 13800,5770 R111.2@14620,4950
VCC: C44.1 R118.1 U18.8 U19.8 U20.8 U21.8 U22.8 U23.8 U24.8 U25.7 | length 7778.5
  Top Layer w7.87: U25.7@8900,3800 U25.7@8910,3800 ; 12210,4320 U21.8@12210,4460 ; U22.8@12890,4440 U22.8@12900,4430
  Top Layer w40: U25.7@8910,3800 9080,3630 9860,3630 9980,3750 9980,4030 10270,4320 ; U18.8@10110,4480 10270,4320 ; 10810,4330 U19.8@10810,4460 ; U20.8@11510,4460 11510,4320 ; 12210,4330 U21.8@12210,4460 ; U22.8@12890,4440 12890,4320 ; U23.8@13550,4440 13550,4320 ; U24.8@14210,4440 14090,4320 13550,4320 ; 10270,4320 11510,4320 ; 11510,4320 12210,4320 12890,4320 ; 12890,4320 13550,4320
  Bottom Layer w40: U25.7@8900,3800 8969.37,3730.63 C44.1@8969.37,3250 ; R118.1@8970,2950 C44.1@8970,3249.37
pads on no net: AC.3 U10.1 U10.5 U10.8 U14.2 U14.8 U14.9 U14.15 U25.1 U25.5 U25.8

## Polygon pours and split planes (outlines as drawn)
GND on Top Layer "Top Layer-No Net 1" (hatched 90Degree grid 20 track 10): 2440,6270 2440,2030 8600,2030 8600,6270
GND on Top Layer "Top Layer-No Net" (hatched 90Degree grid 20 track 10, pour order 1000): 8800,2250 15700,2250 15700,5900 8800,5900

## Silkscreen, mask and mechanical layers (free items; w line width, h text height)
Mechanical 16:
  lines w5: 0,0 0,7600 ; 0,1900 200,1900 ; 0,3800 200,3800 ; 0,5700 200,5700 ; 200,200 200,7400 ; 11300,200 11300,7400 ; 11300,1900 11500,1900 ; 11300,3800 11500,3800 ; 11500,0 11500,7600
  text "A" at 75,6559 h70
  text "B" at 75,4667 h70
  text "B" at 6175,4467 h70
  text "C" at 75,2757 h70
  text "C" at 11375,2757 h70

## Text inside footprints (layer, text, board x,y; h text height)
BRIDGE: Top Overlay "~" at 2884.69,5715.31 h59.06; Top Overlay "~" at 3304.69,5955.31 h59.06; Top Overlay "-" at 3299.96,5740.04 h59.06; Top Overlay "+" at 2884.69,5975.31 h59.06
C1: Top Overlay "+" at 3790,5920 h59.06 r270
C2: Top Overlay "+" at 3810,6240 h59.06 r270
C3: Top Overlay "+" at 4440,5930 h59.06 r270
C4: Top Overlay "+" at 4440,6210 h59.06 r270
C5: Top Overlay "+" at 8016.5,5729.53 h59.06 r180
C6: Top Overlay "+" at 7820,4000 h59.06
C9: Top Overlay "+" at 7050,4590 h59.06 r180
C14: Top Overlay "+" at 9650,3700 h59.06 r90
C15: Top Overlay "+" at 9530,4280 h59.06 r270
C44: Top Overlay "+" at 9086.5,3279.53 h59.06 r180
C45: Top Overlay "+" at 9300,3150 h59.06 r180
U16: Top Overlay "3" at 4130.31,5955.31 h59.06; Top Overlay "2" at 4230.32,5955.32 h59.06; Top Overlay "1" at 4040.16,5955.32 h59.06
U17: Top Overlay "3" at 4130.31,5615.31 h59.06; Top Overlay "2" at 4230.32,5615.31 h59.06; Top Overlay "1" at 4040.16,5615.31 h59.06